# Altium PCB PCB.PcbDoc
Units mm, origin at the board's own origin, x right, y up, seen from the top; angles counter-clockwise.
Board outline 39.05 x 32.07 mm, 2 copper layers (Top Layer, Bottom Layer); 39 components, 35 nets, 167 pads, 103 vias.
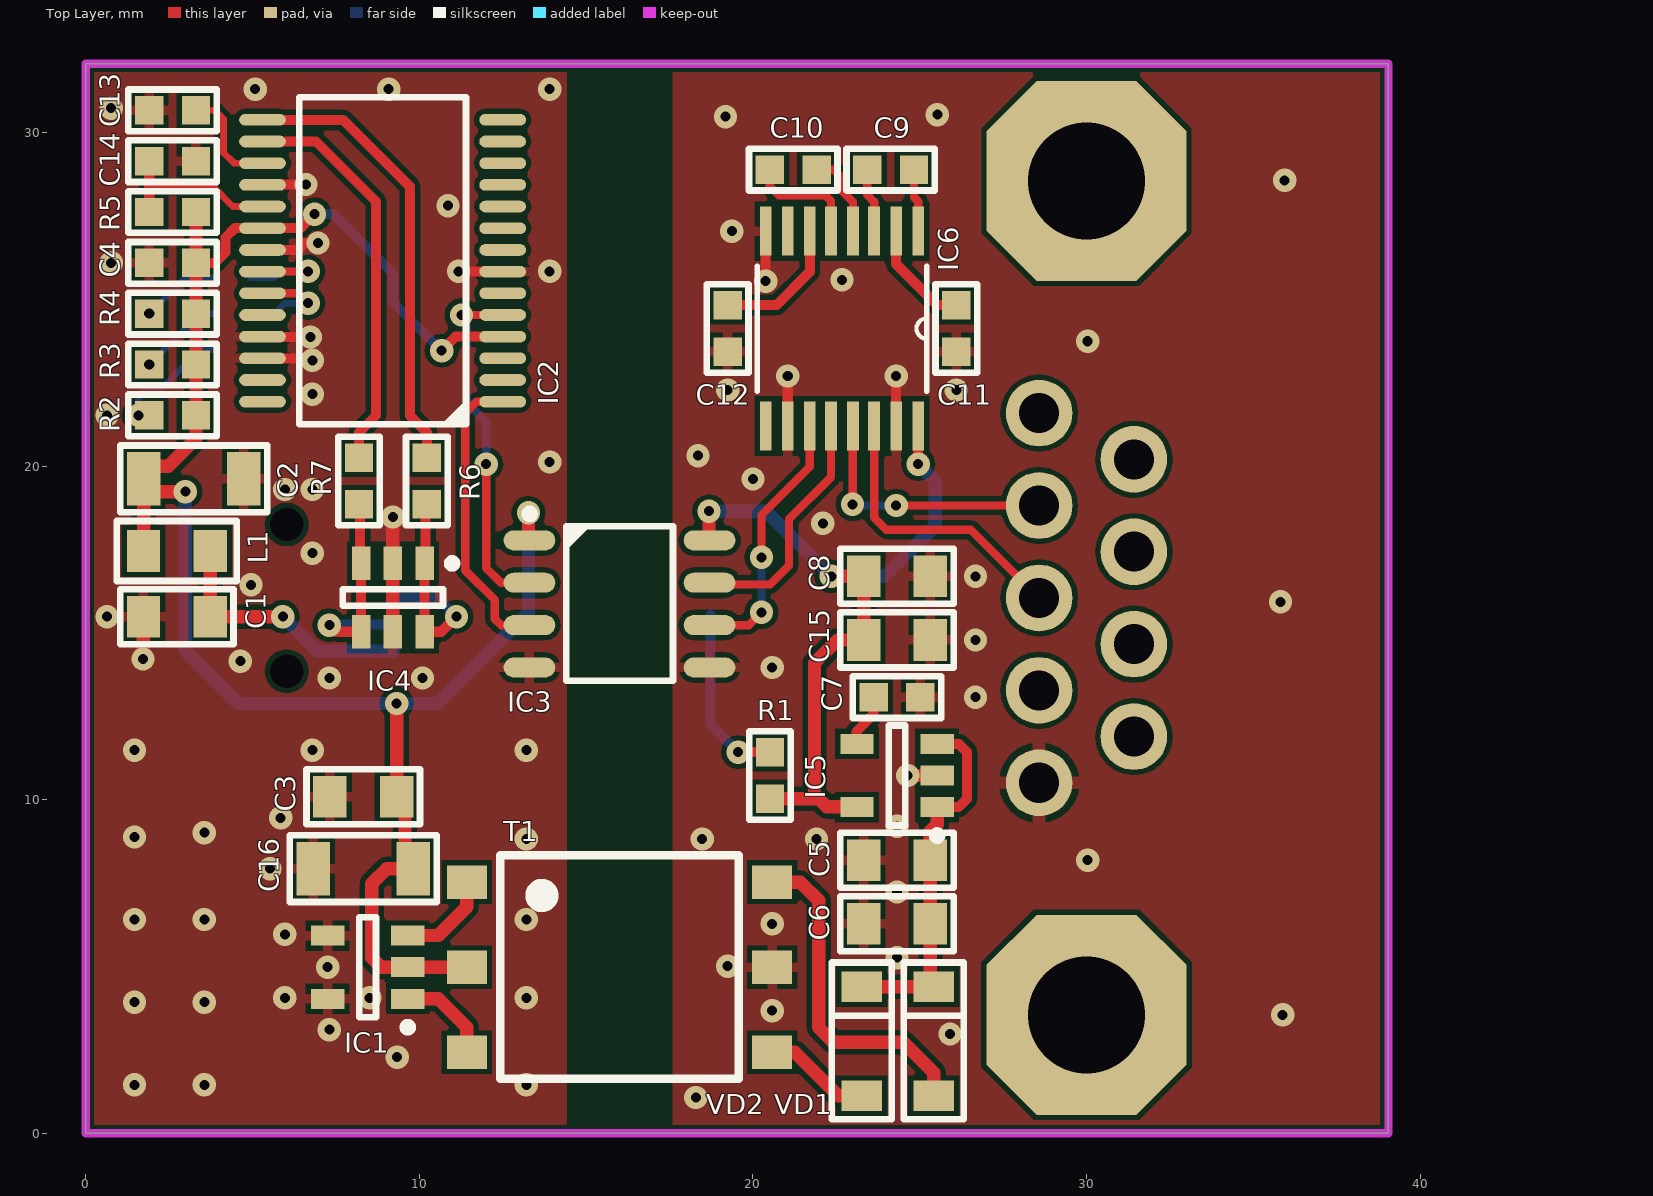
[diagram p0: Top Layer view]
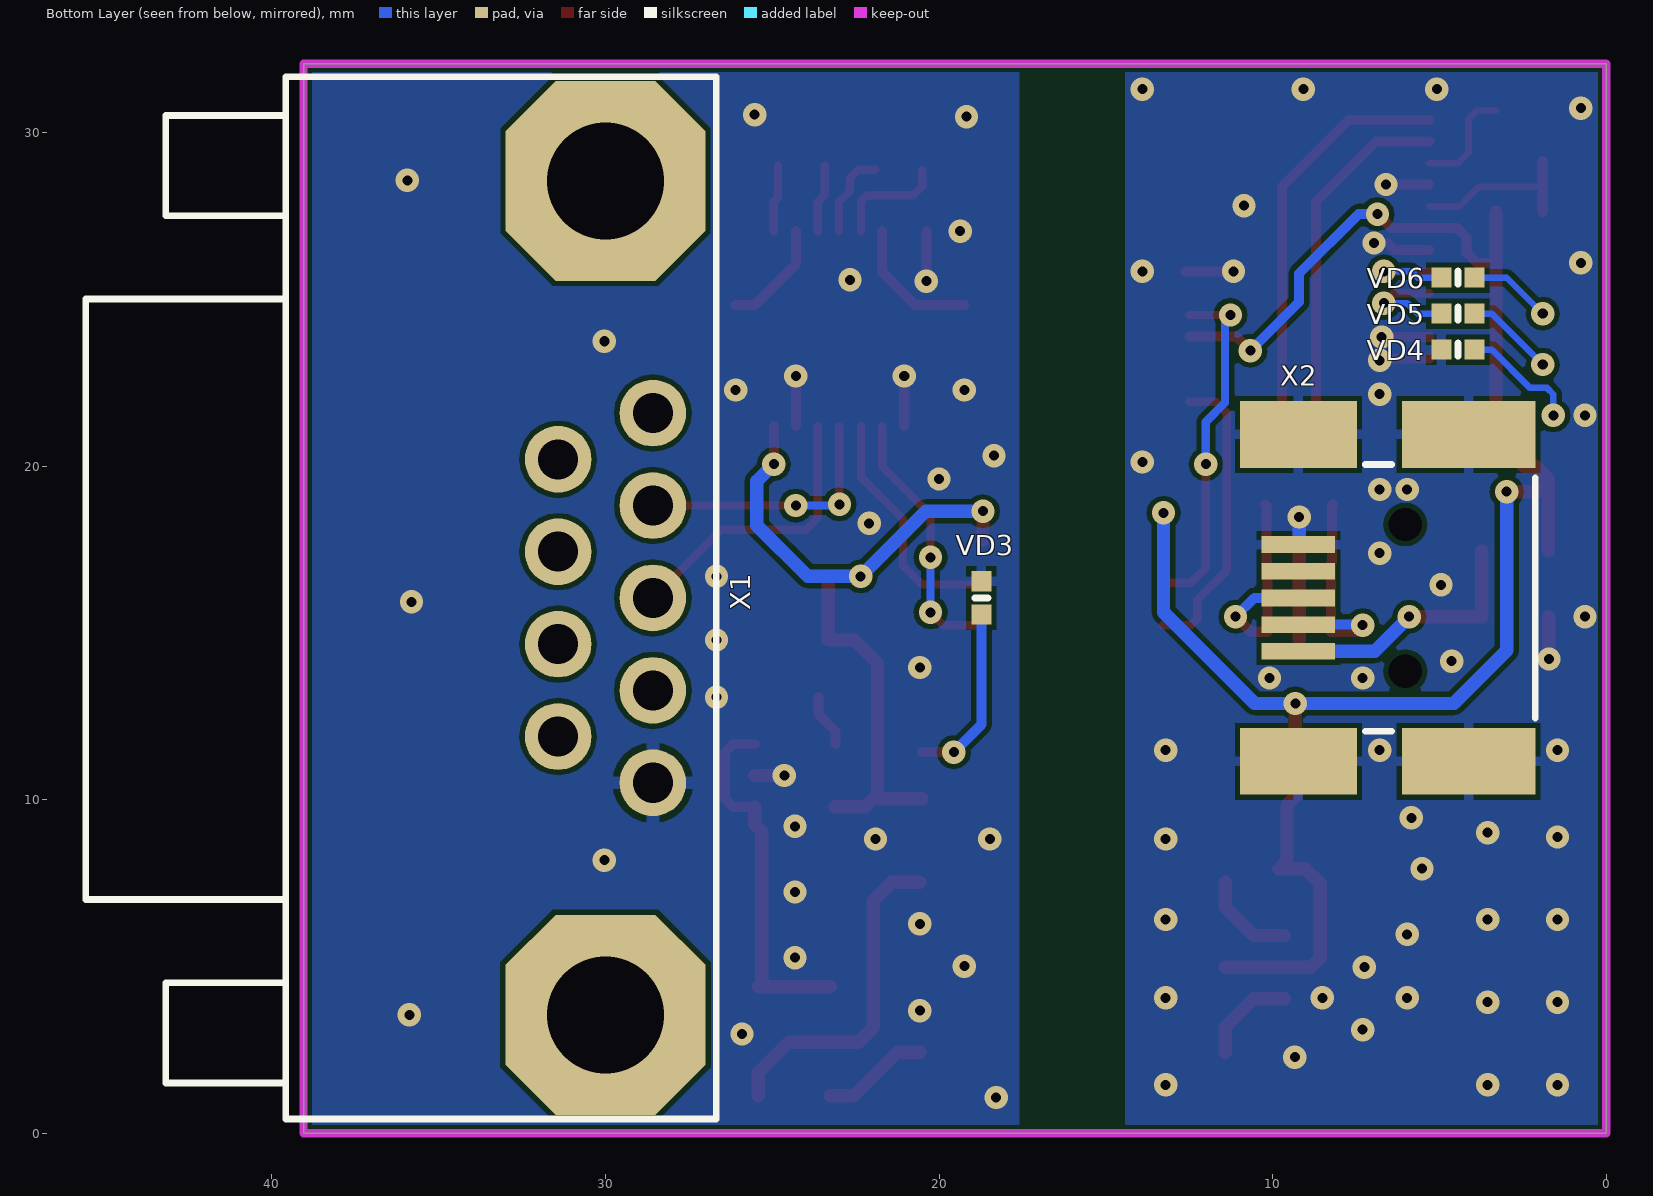
[diagram p1: Bottom Layer view, seen from below]
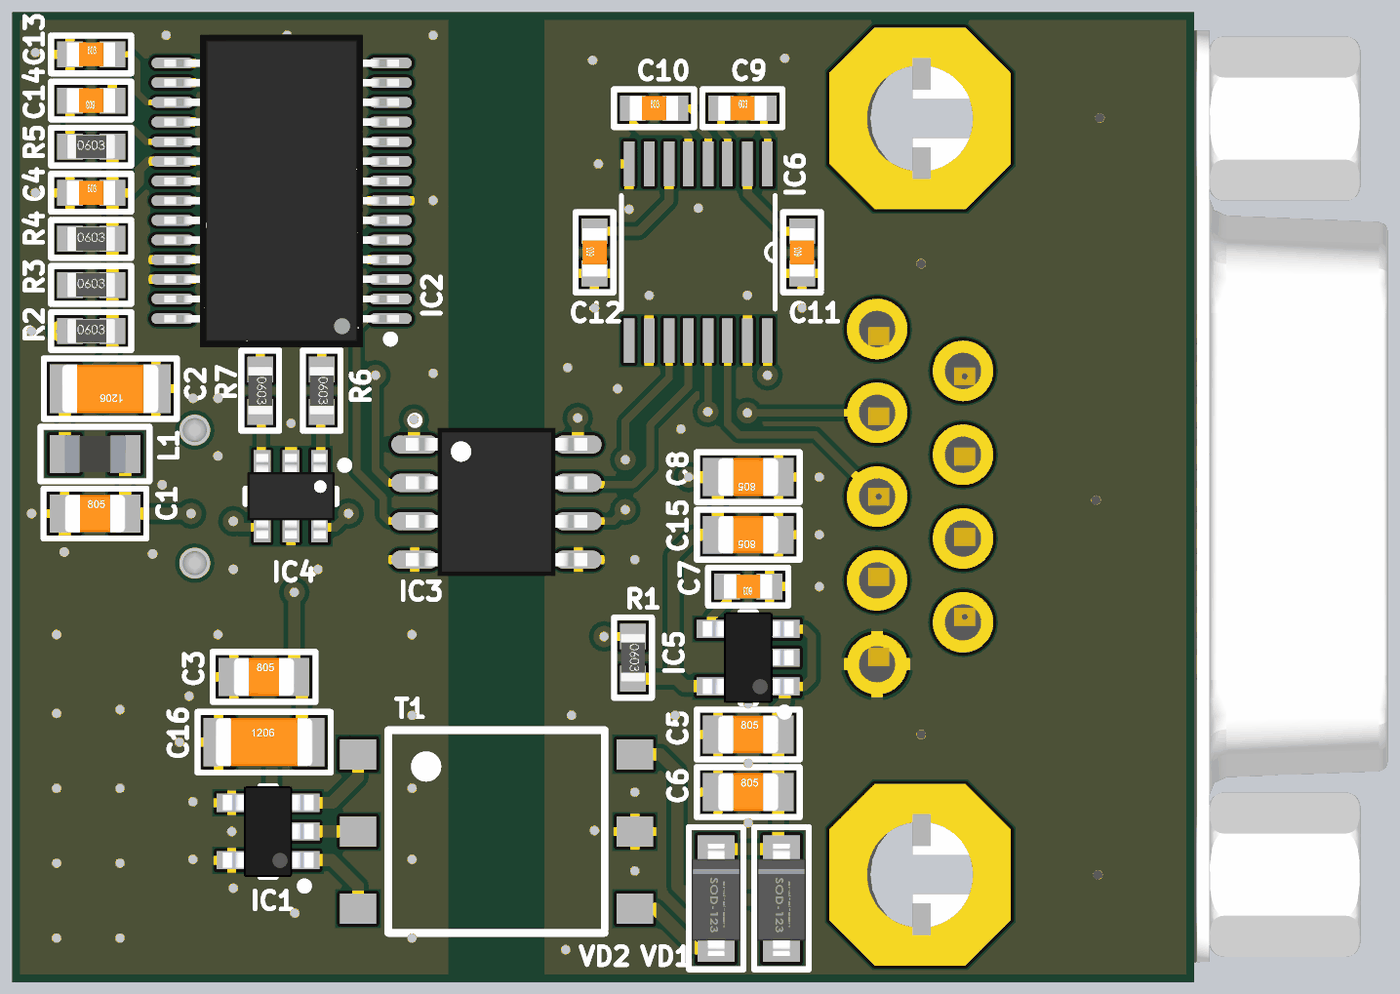
[diagram p2: 3D render of the assembled board from above, using the file's embedded part models]
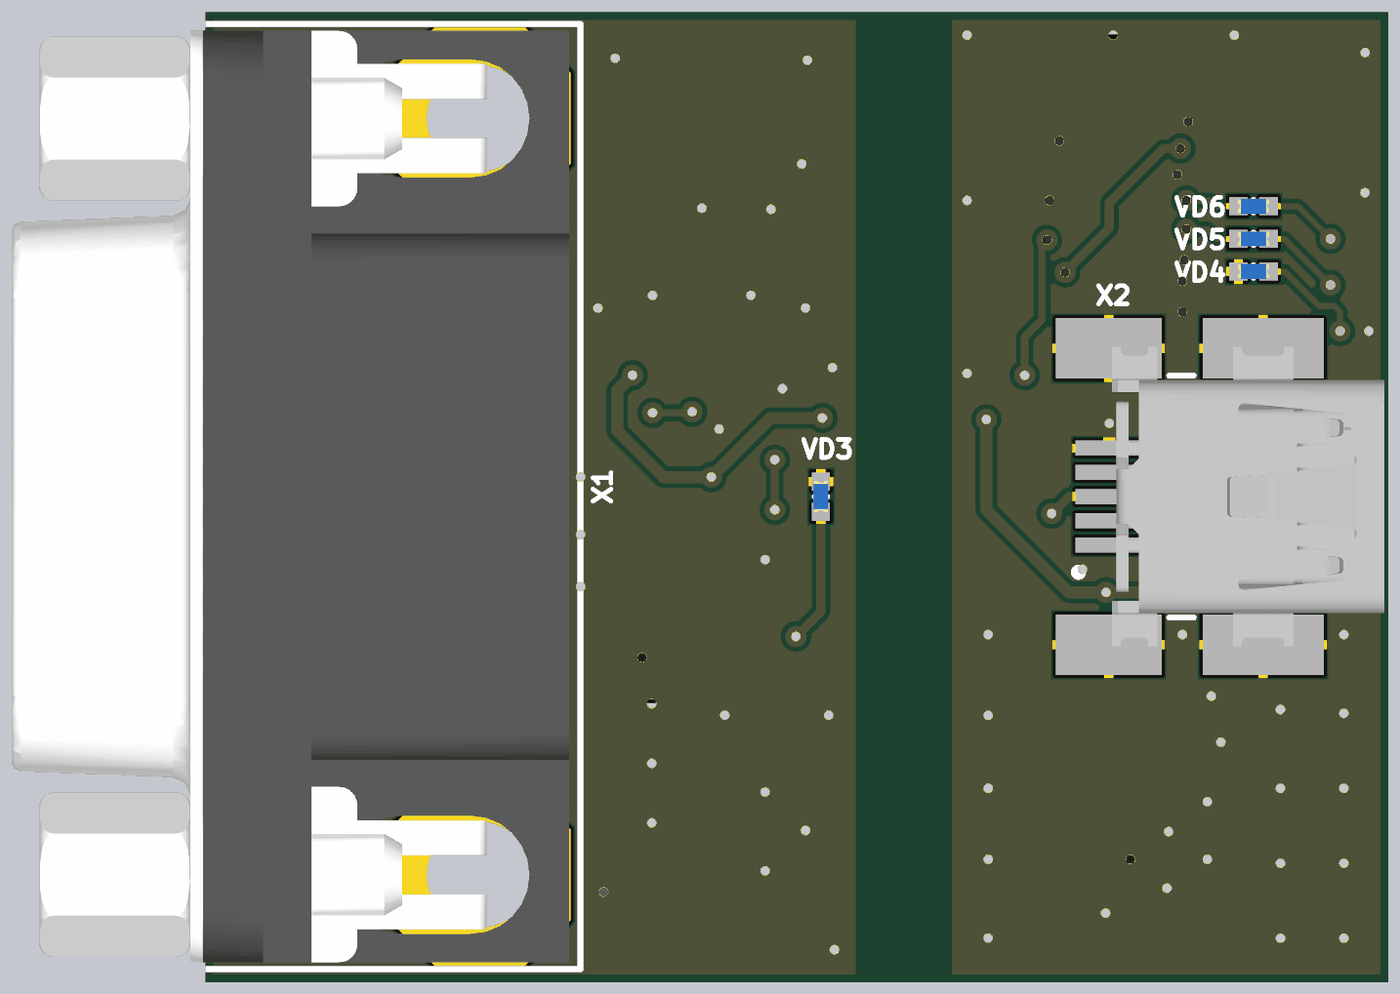
[diagram p3: 3D render of the assembled board from below, using the file's embedded part models]

## Layer stack, top to bottom
Top Solder: solder mask 0.0102, Solder Resist, Dk 3.5
Top Layer: signal copper 0.0356
Dielectric 1: dielectric 0.32, FR-4, Dk 4.8
Bottom Layer: signal copper 0.0356
Bottom Solder: solder mask 0.0102, Solder Resist, Dk 3.5

## Board outline
0,0 39.053,0 39.053,32.068 0,32.068

## Design rules (kind name [scope] priority, off if disabled: settings)
BoardOutlineClearance [All] p1: gap=0.25 ignorepadtopadclearanceinfootprint=FALSE except(0.2: Arc-OutlineEdge Arc-CavityEdge Arc-CutoutEdge Arc-SplitBarrior Arc-SplitContinuation Track-OutlineEdge Track-CavityEdge Track-CutoutEdge Track-SplitBarrior Track-SplitContinuation Region-OutlineEdge Region-CavityEdge Region-CutoutEdge Region-SplitBarrior Region-SplitContinuation Text-OutlineEdge Text-CavityEdge Text-CutoutEdge Text-SplitBarrior Text-SplitContinuation)
Clearance Clearance_1 [InPolygon] p1: gap=0.15 ignorepadtopadclearanceinfootprint=FALSE
Clearance [All] p2: gap=0.15 ignorepadtopadclearanceinfootprint=FALSE
HoleSize [All] p1: absolutevalues=TRUE maxlimit=2.54 minlimit=0.3 maxpercent=80.000 minpercent=20.000
HoleToHoleClearance [All] p1: gap=0.2 allowstackedmicrovias=TRUE
MinimumAnnularRing [All] p1: minimumring=0.2
MinimumSolderMaskSliver [All] p1: minsoldermaskwidth=0.05
PlaneConnect [All] p1: planeconnectstyle=Relief reliefexpansion=0.508 reliefentries=4 reliefconductorwidth=0.4 reliefairgap=0.15
PolygonConnect PolygonConnect_1 [IsVia] p1: connectstyle=Direct reliefconductorwidth=0.254 reliefentries=4 polygonreliefangle="90 Angle" airgapwidth=0.254
PolygonConnect [All] p2: thpad.connectstyle=Relief thpad.reliefconductorwidth=0.4 thpad.reliefentries=4 thpad.polygonreliefangle="90 Angle" thpad.airgapwidth=0.2 smdpad.connectstyle=Relief smdpad.reliefconductorwidth=0.3 smdpad.reliefentries=4 smdpad.polygonreliefangle="90 Angle" smdpad.airgapwidth=0.15 via.connectstyle=Relief via.reliefconductorwidth=0.254 via.reliefentries=4 via.polygonreliefangle="45 Angle" via.airgapwidth=0.254
RoutingVias [All] p1: holewidth=0.3 width=0.7 viastyle="Through Hole" minholewidth=0.3 minwidth=0.7 maxholewidth=0.3 maxwidth=0.7
SilkToSilkClearance [All] p1: silktosilkclearance=0.05
SilkToSolderMaskClearance [IsPad] p1: minsilkscreentomaskgap=0.05 clearancetoexposedcopper=TRUE
SolderMaskExpansion [All] p1: expansion=0.102
UnRoutedNet [All] p1: checkbadconnections=TRUE
UnpouredPolygon [All] p1: allowunpoured=TRUE
Width [All] p1: maxlimit=2 minlimit=0.125 preferedwidth=0.15 minimp=50.000000 maximp=50.000000 favimp=50.000000
22 further rules are at their usual default settings.

## Components (designator, comment, footprint, x,y, rotation, side; value= is the part's Value field where it differs from the comment)
C1 "Ceramic capacitor, 0.1μF, X7R, ±10%, 16V, 0805, -55...+125°C" "CAP: 0805" 2.731,15.494 r0 top value=0.1?F
C2 "Ceramic capacitor, 10.0μF, X7R, ±10%, 50V, 1206, -55...+125°C" "CAP: 1206" 3.239,19.622 r180 top value=10.0?F
C3 "Ceramic capacitor, 0.1μF, X7R, ±10%, 16V, 0805, -55...+125°C" "CAP: 0805" 8.319,10.097 r0 top value=0.1?F
C4 "Ceramic capacitor, 0.1μF, X7R, ±10%, 16V, 0805, -55...+125°C" "CAP: 0603" 2.604,26.099 r0 top value=0.1?F
C5 "Ceramic capacitor, 10.0μF, X7R, ±10%, 16V, 0805, -55...+125°C" "CAP: 0805" 24.321,8.192 r0 top value=10.0?F
C6 "Ceramic capacitor, 0.1μF, X7R, ±10%, 16V, 0805, -55...+125°C" "CAP: 0805" 24.321,6.287 r0 top value=0.1?F
C7 "Ceramic capacitor, 10nF, X7R, ±10%, 16V, 0603, -55...+125°C" "CAP: 0603" 24.321,13.081 r180 top value=10nF
C8 "Ceramic capacitor, 10.0μF, X7R, ±10%, 16V, 0805, -55...+125°C" "CAP: 0805" 24.321,16.701 r180 top value=10.0?F
C9 "Ceramic capacitor, 0.22μF, X7R, ±10%, 16V, 0603, -55...+125°C" "CAP: 0603" 24.13,28.893 r0 top value=0.22?F
C10 "Ceramic capacitor, 1.0μF, X7R, ±10%, 16V, 0603, -55...+125°C" "CAP: 0603" 21.209,28.893 r0 top value=1.0?F
C11 "Ceramic capacitor, 1.0μF, X7R, ±10%, 16V, 0603, -55...+125°C" "CAP: 0603" 26.099,24.13 r90 top value=1.0?F
C12 "Ceramic capacitor, 1.0μF, X7R, ±10%, 16V, 0603, -55...+125°C" "CAP: 0603" 19.241,24.13 r90 top value=1.0?F
C13 "Ceramic capacitor, 0.1μF, X7R, ±10%, 16V, 0603, -55...+125°C" "CAP: 0603" 2.604,30.671 r0 top value=0.1?F
C14 "Ceramic capacitor, 0.1μF, X7R, ±10%, 16V, 0603, -55...+125°C" "CAP: 0603" 2.604,29.147 r180 top value=0.1?F
C15 "Ceramic capacitor, 0.1μF, X7R, ±10%, 16V, 0805, -55...+125°C" "CAP: 0805" 24.321,14.796 r180 top value=0.1?F
C16 "Ceramic capacitor, 10.0μF, X7R, ±10%, 50V, 1206, -55...+125°C" "CAP: 1206" 8.319,7.938 r0 top value=10.0?F
IC1 "SN6501" SOT23-5 8.452,4.984 r180 top
IC2 "FT232RL" 28-SSOP 8.898,26.162 r180 top locked
IC3 "IC digital isolator, 100Mbps, 3000Vrms, 2.25...5.5V, -55...+125°C, 8-SOIC" 8-SOIC 16,15.875 r0 top
IC4 "SN65220DBVR" SOT23-6 9.208,16.066 r270 top locked
IC5 "LP2985IM5-5.0" SOT23-5 24.321,10.732 r180 top locked
IC6 "MAX3232CPW" SOP65P640X120-16N 22.67,24.13 r270 top
L1 "Fixed inductor, 47μH, ±20%, 0805, 100mA, -55...+125°C" "IND: 0805" 2.731,17.463 r0 top value=47?H
R1 "Resistor film, 270R, ±5%, 0603, 0.1W, -55...+125°C" "RES: 0603" 20.511,10.731 r270 top value=270R
R2 "Resistor film, 270R, ±5%, 0603, 0.1W, -55...+125°C" "RES: 0603" 2.604,21.527 r0 top value=270R
R3 "Resistor film, 270R, ±5%, 0603, 0.1W, -55...+125°C" "RES: 0603" 2.604,23.051 r0 top value=270R
R4 "Resistor film, 270R, ±5%, 0603, 0.1W, -55...+125°C" "RES: 0603" 2.604,24.575 r0 top value=270R
R5 "Resistor film, 10K, ±5%, 0603, 0.1W, -55...+125°C" "RES: 0603" 2.604,27.623 r0 top value=10K
R6 "Resistor film, 22R, ±5%, 0603, 0.1W, -55...+125°C" "RES: 0603" 10.223,19.558 r270 top value=22R
R7 "Resistor film, 22R, ±5%, 0603, 0.1W, -55...+125°C" "RES: 0603" 8.191,19.558 r270 top value=22R
T1 "760390014" PCBComponent_1 11.425,4.984 r0 top
VD1 "Schottky diode, 80V, 500mA, 1V, 15pF, SOD-123, -55...+150°C" "DIODE: SOD123" 25.419,1.128 r90 top
VD2 "Schottky diode, 80V, 500mA, 1V, 15pF, SOD-123, -55...+150°C" "DIODE: SOD123" 23.26,1.128 r90 top
VD3 "LED, *, *, *, -55...+150°C" "LED: 0402B" 18.733,16.055 r90 bottom
VD4 "LED, *, *, *, -55...+150°C" "LED: 0402B" 4.445,23.495 r0 bottom
VD5 "LED, *, *, *, -55...+150°C" "LED: 0402B" 4.445,24.575 r0 bottom
VD6 "LED, *, *, *, -55...+150°C" "LED: 0402B" 4.445,25.654 r0 bottom
X1 "Connector, 10pin, 2.54mm, 500VAC, 3A" "CON: DB-9M" 30,16.055 r180 bottom
X2 "USB mini B" "CON: 0675031020" 9.228,16.055 r0 bottom locked

## Footprints (in the part's own frame and the unit in brackets; to place one, negate y for a bottom-side part, rotate by r counter-clockwise, add the part's x,y. Pads: shape width x height; smd on the part's side, far side on the other; paste and mask are expansions set on the pad)
8-SOIC [mm] "pitch 1.27 mm"
  rrect100% 1.55x0.6 smd: 1(-2.7,1.905) 2(-2.7,0.635) 3(-2.7,-0.635) 4(-2.7,-1.905) 5(2.7,-1.905) 6(2.7,-0.635) 7(2.7,0.635) 8(2.7,1.905)
  round 0.7 on Mech1: 28(-2.395,1.8)
  silkscreen extent -2.82,-2.3 1.61,2.82, body extent -3,-2.45 3,2.45, height 1.75
28-SSOP [mm] "pitch 0.65 mm"
  rrect100% 1.4x0.35 smd: 1(-3.6,4.225) 2(-3.6,3.575) 3(-3.6,2.925) 4(-3.6,2.275) 5(-3.6,1.625) 6(-3.6,0.975) 7(-3.6,0.325) 8(-3.6,-0.325) 9(-3.6,-0.975) 10(-3.6,-1.625) 11(-3.6,-2.275) 12(-3.6,-2.925) 13(-3.6,-3.575) 14(-3.6,-4.225) 15(3.6,-4.225) 16(3.6,-3.575) 17(3.6,-2.925) 18(3.6,-2.275) 19(3.6,-1.625) 20(3.6,-0.975) 21(3.6,-0.325) 22(3.6,0.325) 23(3.6,0.975) 24(3.6,1.625) 25(3.6,2.275) 26(3.6,2.925) 27(3.6,3.575) 28(3.6,4.225)
  round 0.5 on Top Overlay: ""(-3.6,4.9)
  round 0.5 on Mech1: ""(-3.4,4.6)
  silkscreen extent -2.5,-4.9 2.5,4.9, body extent -3.88,-5.16 3.88,5.17, height 2.15
"CAP: 0603" [mm]
  rect 0.85x0.85 smd: 1(-0.7,0) 2(0.7,0)
  silkscreen extent -1.33,-0.63 1.33,0.63, body extent -0.8,-0.4 0.8,0.4, height 0.3
"CAP: 0805" [mm]
  rect 1x1.25 smd: 1(-1,0) 2(1,0)
  silkscreen extent -1.7,-0.82 1.7,0.82, body extent -1,-0.62 1,0.63, height 0.78
"CAP: 1206" [mm]
  rect 1x1.6 smd: 1(-1.5,0) 2(1.5,0)
  silkscreen extent -2.2,-1 2.2,1, body extent -1.6,-0.8 1.6,0.8, height 1
"CON: 0675031020" [mm]
  rect 4x2 smd: 0(-5.1,-4.9) 0(-5.1,4.9)
  rect 3.5x2 smd: 0(0,-4.9) 0(0,4.9)
  rect 2.2x0.5 smd: 1(0,1.6) 2(0,0.8) 3(0,0) 4(0,-0.8) 5(0,-1.6)
  round 0 hole 1: ""(-3.2,-2.2) ""(-3.2,2.2)
  round 0.5 on Mech1: ""(-0.6,4.5)
  round 0.5 on Bottom Overlay: ""(1,2.5)
  silkscreen extent -7.1,-4 -2,4, body extent -9.1,-4.95 -0.1,4.95, height 3.95
"CON: DB-9M" [mm]
  round 2 hole 1.2: 1(1.42,5.54) 2(1.42,2.77) 3(1.42,0) 4(1.42,-2.77) 5(1.42,-5.54) 6(-1.42,4.155) 7(-1.42,1.385) 8(-1.42,-1.385) 9(-1.42,-4.155)
  round 0.5 on Mech1: 31(-14.9,14.8)
  oct 6x6 hole 3.5: G1(0,12.5) G2(0,-12.5)
  silkscreen extent -15.58,-15.62 3.32,15.62, body extent -15.45,-15.4 2.95,15.4, height 12.53
"DIODE: SOD123" [mm]
  rect 0.91x1.22 smd: 1(0,0) 2(3.275,0)
  round 0.5 on Mech1: 4(3,0.4)
  silkscreen extent -0.7,-0.9 4,0.9, body extent -0.25,-0.8 3.45,0.8, height 1.25
"IND: 0805" [mm]
  rect 1x1.25 smd: 1(-1,0) 2(1,0)
  silkscreen extent -1.8,-0.9 1.8,0.9, body extent -1,-0.62 1,0.63, height 0.85
"LED: 0402B" [mm]
  rect 0.6x0.6 smd: 1(-0.5,0) 2(0.5,0)
  silkscreen extent 0,-0.2 0,0.2, body extent -0.5,-0.25 0.51,0.25, height 0.45
PCBComponent_1 [mm]
  rect 1.2x1 smd: 1(0,2.55) 2(0,0) 3(0,-2.55) 4(9.15,-2.55) 5(9.15,0) 6(9.15,2.55)
  silkscreen extent 1,-3.35 8.15,3.35
"RES: 0603" [mm]
  rect 0.85x0.85 smd: 1(-0.7,0) 2(0.7,0)
  silkscreen extent -1.33,-0.63 1.33,0.63, body extent -0.8,-0.4 0.8,0.4, height 0.44
SOP65P640X120-16N [mil]
  rect 58x14 smd: 1(-115,90) 2(-115,64) 3(-115,38) 4(-115,13) 5(-115,-13) 6(-115,-38) 7(-115,-64) 8(-115,-90) 9(115,-90) 10(115,-64) 11(115,-38) 12(115,-13) 13(115,13) 14(115,38) 15(115,64) 16(115,90)
  silkscreen extent -74,-100 74,100
SOT23-5 [mm] "pitch 0.95 mm"
  rect 1x0.6 smd: 1(-1.2,0.95) 2(-1.2,0) 3(-1.2,-0.95) 4(1.2,-0.95) 5(1.2,0.95)
  round 0.5 on Mech1: ""(-1.1,1.1)
  silkscreen extent -1.33,-1.5 0.25,1.92, body extent -1.5,-1.5 1.5,1.5, height 1.3
SOT23-6 [mm] "pitch 0.95 mm"
  rect 1x0.55 smd: 1(-1.025,0.95) 2(-1.025,0) 3(-1.025,-0.95) 4(1.025,-0.95) 5(1.025,0) 6(1.025,0.95)
  round 0.5 on Mech1: ""(-0.8,1)
  silkscreen extent -1.15,-1.5 0.25,1.9, body extent -1.4,-1.45 1.4,1.45, height 1.45

## Part data
C1 C3 C4 C6 C15: library part Ceramic_0805, Manufacturer=Yageo, Package=0805, PartNumber=CC0805KRX7R7BB104, Temperature=-55...+125°C, Tolerance=±10%, TypeCapacitor="Ceramic capacitor", TypeDielectric=X7R, ValueManufacturerPartNumber="Ceramic capacitor, 0.1?F, X7R, ±10%, 16V, 0805, -55...+125°C", Voltage=16V, HelpURL=https://www.digikey.com/product-detail/en/yageo/CC0805KRX7R7BB104/311-1142-1-ND/303052
C2 C16: library part Ceramic_1206, Manufacturer=Yageo, Package=1206, PartNumber=CC1206KRX7R9BB104, Temperature=-55...+125°C, Tolerance=±10%, TypeCapacitor="Ceramic capacitor", TypeDielectric=X7R, ValueManufacturerPartNumber="Ceramic capacitor, 10.0?F, X7R, ±10%, 50V, 1206, -55...+125°C", Voltage=50V, HelpURL=https://www.digikey.com/product-detail/en/yageo/CC1206KRX7R9BB104/311-1179-1-ND/303089
C5 C8: library part Ceramic_0805, Manufacturer=Yageo, Package=0805, PartNumber=CC0805KRX7R7BB104, Temperature=-55...+125°C, Tolerance=±10%, TypeCapacitor="Ceramic capacitor", TypeDielectric=X7R, ValueManufacturerPartNumber="Ceramic capacitor, 10.0?F, X7R, ±10%, 16V, 0805, -55...+125°C", Voltage=16V, HelpURL=https://www.digikey.com/product-detail/en/yageo/CC0805KRX7R7BB104/311-1142-1-ND/303052
C7: library part Ceramic_0603, Manufacturer=Yageo, Package=0603, PartNumber=CC0603KRX7R7BB104, Temperature=-55...+125°C, Tolerance=±10%, TypeCapacitor="Ceramic capacitor", TypeDielectric=X7R, Voltage=16V, HelpURL=https://www.digikey.com/product-detail/en/yageo/CC0603KRX7R7BB104/311-1088-1-ND/302998, ValueManufacturerPartNumber="Ceramic capacitor, 10nF, X7R, ±10%, 16V, 0603, -55...+125°C"
C9: library part Ceramic_0603, Manufacturer=Yageo, Package=0603, PartNumber=CC0603KRX7R7BB104, Temperature=-55...+125°C, Tolerance=±10%, TypeCapacitor="Ceramic capacitor", TypeDielectric=X7R, ValueManufacturerPartNumber="Ceramic capacitor, 0.22?F, X7R, ±10%, 16V, 0603, -55...+125°C", Voltage=16V, HelpURL=https://www.digikey.com/product-detail/en/yageo/CC0603KRX7R7BB104/311-1088-1-ND/302998
C10 C11 C12: library part Ceramic_0603, Manufacturer=Yageo, Package=0603, PartNumber=CC0603KRX7R7BB104, Temperature=-55...+125°C, Tolerance=±10%, TypeCapacitor="Ceramic capacitor", TypeDielectric=X7R, ValueManufacturerPartNumber="Ceramic capacitor, 1.0?F, X7R, ±10%, 16V, 0603, -55...+125°C", Voltage=16V, HelpURL=https://www.digikey.com/product-detail/en/yageo/CC0603KRX7R7BB104/311-1088-1-ND/302998
C13 C14: library part Ceramic_0603, Manufacturer=Yageo, Package=0603, PartNumber=CC0603KRX7R7BB104, Temperature=-55...+125°C, Tolerance=±10%, TypeCapacitor="Ceramic capacitor", TypeDielectric=X7R, ValueManufacturerPartNumber="Ceramic capacitor, 0.1?F, X7R, ±10%, 16V, 0603, -55...+125°C", Voltage=16V, HelpURL=https://www.digikey.com/product-detail/en/yageo/CC0603KRX7R7BB104/311-1088-1-ND/302998
IC2: "USB e??e", Package="SSOP-28 FTDI, Future", Availability=Unavailable, MF="FTDI, Future", MP=FT232RL, Price=None, SnapEDA_Link=https://www.snapeda.com/parts/FT232RL/FTDI%2C%20Future%20Technology%20Devices%20International%20Ltd/view-part/1077088/?ref=snap
IC3: library part ISO7721DR, "Digital isolator", Manufacturer="Texas Instruments", Package=8-SOIC, Temperature=-55...+125°C, ComponentType="IC digital isolator", DataRate=100Mbps, HelpURL=https://www.digikey.com/product-detail/en/texas-instruments/ISO7721DR/296-48296-1-ND/8347715, Isolation=3000Vrms, PartNumber=ISO7721DR, Supply=2.25...5.5V, ValueManufacturerPartNumber="IC digital isolator, 100Mbps, 3000Vrms, 2.25...5.5V, -55...+125°C, 8-SOIC"
IC4: "IC SINGLE USB PORT TVS SOT-23-6", Package="SOT-23-6 Texas Instruments", Availability=Unavailable, MF="Texas Instruments", MP=SN65220DBVR, Price=None, SnapEDA_Link=https://www.snapeda.com/parts/SN65220DBVR/Texas%20Instruments/view-part/214591/?ref=snap
IC6: "2/2 Transceiver Full RS232 16-TSSOP", Package="TSSOP-16 Texas Instruments", Availability=Unavailable, MF="Texas Instruments", MP=MAX3232CPW, Price=None, SnapEDA_Link=https://www.snapeda.com/parts/MAX3232CPW/Texas%20Instruments/view-part/396297/?ref=snap
L1: library part Inductor_0805, Manufacturer="Murata Electronics", MaxCurrent=100mA, Package=0805, PartNumber=LQM21FN100M70L, Temperature=-55...+125°C, Tolerance=±20%, TypeInductor="Fixed inductor", ValueManufacturerPartNumber="Fixed inductor, 47?H, ±20%, 0805, 100mA, -55...+125°C", HelpURL=https://www.digikey.com/product-detail/en/murata-electronics-north-america/LQM21FN100M70L/490-4029-1-ND/1016289
R1 R2 R3 R4 R5 R6 R7: library part Resistor_0603, Manufacturer=Yageo, Package=0603, PartNumber=RC0603JR-07100RL, Power=0.1W, Temperature=-55...+125°C, Tolerance=±5%, TypeResistor="Resistor film", HelpURL=https://www.digikey.com/product-detail/en/yageo/RC0603JR-07100RL/311-100GRCT-ND/729644
  R1 R2 R3 R4: ValueManufacturerPartNumber="Resistor film, 270R, ±5%, 0603, 0.1W, -55...+125°C"
  R5: ValueManufacturerPartNumber="Resistor film, 10K, ±5%, 0603, 0.1W, -55...+125°C"
  R6 R7: ValueManufacturerPartNumber="Resistor film, 22R, ±5%, 0603, 0.1W, -55...+125°C"
VD1 VD2: library part Schottky_single, Current=500mA, Manufacturer="Diodes Incorporated", Package=SOD-123, PartNumber=MBR0520L, Temperature=-55...+150°C, Voltage=80V, VoltageDrop=1V, HelpURL=https://www.digikey.com/product-detail/en/diodes-incorporated/MBR0580S1-7/MBR0580S1-7DICT-ND/5080371, RecoveryTime=15pF, TypeDiode="Schottky diode", ValueManufacturerPartNumber="Schottky diode, 80V, 500mA, 1V, 15pF, SOD-123, -55...+150°C"
VD3 VD4: library part LED_single, Color=RED, Temperature=-55...+150°C, TypeDiode=LED, ValueManufacturerPartNumber="LED, *, *, *, -55...+150°C"
VD5: library part LED_single, Color=GREEN, Temperature=-55...+150°C, TypeDiode=LED, ValueManufacturerPartNumber="LED, *, *, *, -55...+150°C"
VD6: library part LED_single, Color=BLUE, Temperature=-55...+150°C, TypeDiode=LED, ValueManufacturerPartNumber="LED, *, *, *, -55...+150°C"
X1: library part Connector_DB9F, CurrentMax=3A, Manufacturer=Connfly, PartNumber=PBD-10, VoltageMax=500VAC, CommentText="\"Ðàçúåì\"", HelpURL=https://www.chipdip.ru/product/pbd-10, Multichannel=10pin, Pitch=2.54mm, TypeConnector=Connector, ValueManufacturerPartNumber="Connector, 10pin, 2.54mm, 500VAC, 3A"
X2: library part Connector_USB_mini_B, Manufacturer=Molex, PartNumber=0675031020, CommentText="\"USB\"", HelpURL=https://www.digikey.com/product-detail/en/molex/0675031020/WM5461CT-ND/1624427, TypeConnector="USB mini B", ValueManufacturerPartNumber="USB mini B"
IC5: SnapEDA_Link=https://www.snapeda.com/parts/LP2985IM550/Texas%20Instruments/view-part/29473/?ref=snap

## Via types
v1: diameter 0.7, hole 0.3, Top Layer to Bottom Layer, tented both sides, 103 vias

## Nets (pads, with @x,y where several pads share a name; then routed paths per layer and width w, separated by ;. In a path a pad name is that pad's centre, name@x,y a point inside that pad or via, vN(x,y) a via of type N, cw(c..) or ccw(c..) an arc to the next point about the centre after c; other vN are vias at no path point)
3V3: C13.2 IC2.17 | length 3.2
  Top Layer w0.2: C13.2 3.873,30.671 4.127,30.416 4.127,29.4 4.441,29.087 IC2.17
+5_ISO: C8.2 C15.2 IC3.8 IC5.5 IC6.16 R1.2 | length 23.8
  Top Layer w0.3: v1(24.956,20.066) IC6.16
  Top Layer w0.4: v1(18.685,18.654) 18.685,17.796 IC3.8 ; R1.2 21.973,10.031 ; v1(22.352,16.701) C8.2 C15.2 22.543,14.796 21.844,14.097 21.844,10.16 21.973,10.031 ; IC5.5@23.121,9.792 22.212,9.792 21.973,10.031
  Bottom Layer w0.4: v1(18.685,18.654) 20.399,18.654 v1(22.352,16.701) 23.94,16.701 25.464,18.225 25.464,19.558 v1(24.956,20.066)
+5_USB: C2.2 C3.2 C4.2 C16.2 IC1.2 IC2.4 IC2.20 IC3.1 L1.1 R2.2 R3.2 R4.2 R5.2 T1.2 | length 57.3
  Top Layer w0.2: IC3.1@13.272,17.809 IC3.1
  Top Layer w0.3: C4.2 3.874,26.099 4.191,26.416 4.191,26.86 4.468,27.137 6.371,27.137 6.378,27.145 6.444,27.145 v1(6.858,27.559) ; v1(10.668,23.469) 11.086,23.887 IC2.4
  Top Layer w0.4: L1.1 1.731,17.526 1.735,17.53 1.735,19.618 C2.2 ; v1(2.985,19.241) 2.039,19.241 1.739,19.541 C2.2 ; R5.2 C4.2 R4.2 R3.2 R2.2 3.304,20.83 2.477,20.003 2.12,20.003 C2.2 ; v1(9.319,12.891) C3.2 9.569,9.847 9.569,8.188 C16.2 9.017,7.938 8.573,7.493 8.573,5.271 8.859,4.984 IC1.2 T1.2 ; IC3.1@13.272,17.809 v1(13.272,18.606)
  Bottom Layer w0.3: v1(6.858,27.559) 7.429,27.559 9.207,25.781 9.207,24.929 v1(10.668,23.469)
  Bottom Layer w0.4: v1(2.985,19.241) 2.985,14.478 4.572,12.891 v1(9.319,12.891) 10.541,12.891 13.272,15.621 v1(13.272,18.606)
C1_m: C9.1 IC6.3 | length 2.1
  Top Layer w0.25: C9.1@23.43,29.02 23.43,28.132 23.635,27.927 IC6.3
C1_p: C9.2 IC6.1 | length 2
  Top Layer w0.25: C9.2@24.83,29.02 24.83,28.066 24.956,27.94 IC6.1
C2_m: C10.1 IC6.5 | length 3.4
  Top Layer w0.25: C10.1 20.509,28.386 20.764,28.131 22.162,28.131 22.339,27.953 IC6.5
C2_p: C10.2 IC6.4 | length 2.6
  Top Layer w0.25: C10.2 22.416,28.893 22.67,28.639 22.67,28.258 23,27.927 IC6.4
D+: IC4.1 IC4.6 R6.2 X2.3 | length 7.1
  Top Layer w0.3: R6.2 10.191,18.825 10.191,17.124 IC4.1 IC4.6 10.659,15.041 v1(11.113,15.494)
  Bottom Layer w0.3: X2.3 10.552,16.055 v1(11.113,15.494)
D-: IC4.3 IC4.4 R7.2 X2.2 | length 6.8
  Top Layer w0.3: v1(7.303,15.24) 7.502,15.041 IC4.4 IC4.3 8.225,17.124 8.225,18.825 R7.2
  Bottom Layer w0.3: v1(7.303,15.24) 7.318,15.255 X2.2
GND: C5.1 C6.1 C7.1 C8.1 C11.1 C12.1 C15.1 IC3.5 IC5.2 IC6.8 IC6.10 IC6.15 T1.5 VD3.2 X1.5 | length 5.4
  Top Layer w0.3: v1(20.384,25.552) IC6.8 ; IC6.10 v1(21.044,22.708) ; IC6.15 v1(24.295,22.708)
  Top Layer w0.4: v1(24.638,10.731) IC5.2
  other v1: 18.288,1.08 25.908,2.985 35.878,3.556 20.574,3.683 19.241,5.017 24.321,5.271 20.574,6.287 24.321,7.239 30.036,8.192 18.479,8.827 21.907,8.826 24.321,9.208 26.67,13.081 20.574,13.97 26.67,14.795 35.814,15.939 26.67,16.7 22.098,18.288 20.002,19.621 18.351,20.32 19.241,22.289 26.098,22.288 30.036,23.749 22.669,25.59 19.368,27.051 35.941,28.575 19.177,30.48 25.527,30.544
GND_USB: C1.1 C2.1 C3.1 C4.1 C13.1 C14.1 C16.1 IC1.4 IC1.5 IC2.7 IC2.18 IC2.21 IC2.25 IC2.26 IC3.4 IC4.2 IC4.5 VD4.2 X2.0 X2.5 | length 13.2
  Top Layer w0.2: IC2.18 IC2.18@5.309,28.448
  Top Layer w0.3: IC2.26 6.735,23.237 v1(6.794,23.177) ; IC2.25 5.309,23.876 v1(6.731,23.876) ; IC2.21 6.357,26.487 6.565,26.695 v1(6.961,26.695) ; IC2.18@5.309,28.448 v1(6.604,28.448) ; v1(11.176,25.845) 11.18,25.841 12.494,25.841 IC2.7 IC2.7@12.61,25.837
  Top Layer w0.4: v1(1.715,14.224) 1.723,14.232 1.723,15.486 C1.1 ; IC4.5@9.208,14.811 IC4.2 v1(9.208,18.479)
  Bottom Layer w0.3: X2.5@9.208,17.675 X2.5
  Bottom Layer w0.4: X2.5@9.208,17.675 v1(9.208,18.479)
  other v1: 1.46,1.46 3.556,1.46 13.208,1.46 9.335,2.286 7.303,3.112 1.46,3.937 3.556,3.937 5.969,4.064 8.509,4.064 13.208,4.064 7.252,4.984 5.969,5.969 1.46,6.413 3.556,6.413 13.208,6.413 5.525,7.938 13.208,8.826 1.46,8.89 3.556,9.017 5.842,9.462 1.46,11.493 6.794,11.493 13.208,11.493 7.303,13.653 10.097,13.653 4.636,14.161 0.635,15.494 4.953,16.447 6.795,17.399 5.969,19.304 6.795,19.304 13.906,20.13 0.635,21.527 6.795,22.162 13.906,25.845 0.762,26.098 10.858,27.813 0.762,30.734 5.08,31.305 9.08,31.305 13.906,31.305
NetC1_2: C1.2 L1.2 X2.1 | length 7.9
  Top Layer w0.4: L1.2 C1.2 5.842,15.494 v1@5.906,15.431
  Bottom Layer w0.4: v1(5.906,15.494) 6.945,14.455 X2.1
NetC5_2: C5.2 C6.2 IC5.1 IC5.3 VD1.2 VD2.2 | length 11.1
  Top Layer w0.3: IC5.1 26.165,9.782 26.416,10.033 26.416,11.43 26.175,11.671 IC5.3@25.521,11.671
  Top Layer w0.4: VD2.2 VD1.2 25.321,4.501 C6.2 C5.2 25.321,9.065 25.521,9.265 IC5.1
NetC7_2: C7.2 IC5.4 | length 1.6
  Top Layer w0.3: IC5.4@23.101,11.682 23.101,12.052 23.621,12.572 C7.2
NetIC1_1: IC1.1 T1.3 | length 2.9
  Top Layer w0.4: IC1.1 10.571,4.034 11.425,3.18 T1.3
NetIC1_3: IC1.3 T1.1 | length 2.9
  Top Layer w0.4: IC1.3 10.57,5.934 11.425,6.79 T1.1
NetIC2_15: IC2.15 R6.1 | length 13.6
  Top Layer w0.3: IC2.15 7.713,30.387 9.716,28.385 9.716,21.526 10.223,21.018 R6.1
NetIC2_16: IC2.16 R7.1 | length 12
  Top Layer w0.3: IC2.16 6.903,29.737 8.7,27.94 8.7,21.526 8.191,21.018 R7.1
NetR1_1: R1.1 VD3.1 | length 5.4
  Top Layer w0.3: v1(19.558,11.43) R1.1
  Bottom Layer w0.3: VD3.1 18.733,12.255 v1(19.558,11.43)
NetR2_1: R2.1 VD4.1 | length 3.5
  Bottom Layer w0.2: v1(1.587,21.526) 1.587,22.162 1.778,22.352 2.286,22.352 3.429,23.495 VD4.1
NetR3_1: R3.1 VD5.1 | length 2.7
  Bottom Layer w0.2: v1(1.904,23.051) 3.428,24.575 VD5.1
NetR4_1: R4.1 VD6.1 | length 2.5
  Bottom Layer w0.2: v1(1.904,24.575) 2.983,25.654 VD6.1
NetT1_4: T1.4 VD2.1 | length 3.2
  Top Layer w0.4: T1.4 21.252,2.434 22.558,1.128 VD2.1
NetT1_6: T1.6 VD1.1 | length 10.1
  Top Layer w0.4: T1.6 21.422,7.534 21.971,6.985 21.971,3.175 22.416,2.731 24.511,2.731 25.419,1.823 VD1.1
RST: C14.2 IC2.19 R5.1 | length 5.2
  Top Layer w0.2: 1.904,28.385 3.81,28.385 4.407,27.787 IC2.19
  Top Layer w0.3: R5.1 1.904,28.385 C14.2
RX: IC3.7 IC6.12 | length 7.3
  Top Layer w0.25: IC3.7 18.754,16.456 20.515,16.456 21.082,17.023 21.082,18.415 22.339,19.672 IC6.12
RxD: IC2.5 IC3.2 | length 10.6
  Top Layer w0.25: v1(11.266,24.537) IC2.5 ; v1(12.002,20.066) 12.002,16.955 12.446,16.51 IC3.2
  Bottom Layer w0.25: v1(11.266,24.537) 11.43,24.373 11.43,21.907 12.002,21.336 v1(12.002,20.066)
RxD_C: IC6.13 X1.2 | length 8
  Top Layer w0.25: v1(22.987,18.86) 22.993,18.866 22.993,21.203 IC6.13 ; v1(24.292,18.825) X1.2
  Bottom Layer w0.25: v1(22.987,18.86) 23.022,18.825 v1(24.292,18.825)
RXLED: IC2.22 VD6.2 | length 3.2
  Top Layer w0.25: IC2.22 5.301,25.841 6.664,25.841 v1(6.668,25.845)
  Bottom Layer w0.2: VD6.2 5.652,25.654 5.842,25.845 v1(6.668,25.845)
TX: IC3.6 IC6.11 | length 7.9
  Top Layer w0.25: IC3.6 19.876,15.24 v1(20.256,15.621) ; v1(20.256,17.272) 20.256,18.542 21.704,19.99 IC6.11
  Bottom Layer w0.25: v1(20.256,15.621) v1(20.256,17.272)
TxD: IC2.1 IC3.3 | length 8.9
  Top Layer w0.25: IC2.1 11.714,21.937 11.376,21.6 11.376,16.881 12.256,16.002 12.256,15.431 12.446,15.24 IC3.3
TxD_C: IC6.14 X1.3 | length 8.7
  Top Layer w0.25: IC6.14 23.635,18.466 24.003,18.098 26.537,18.098 X1.3
TXLED: IC2.23 VD5.2 | length 3.3
  Top Layer w0.25: IC2.23 6.373,25.187 v1(6.668,24.892)
  Bottom Layer w0.2: VD5.2 5.652,24.575 5.969,24.892 v1(6.668,24.892)
V_m: C12.2 IC6.6 | length 4.1
  Top Layer w0.3: C12.2 20.703,24.83 21.704,25.832 IC6.6
V_p: C11.2 IC6.2 | length 3.3
  Top Layer w0.3: IC6.2 24.295,26.06 25.526,24.83 C11.2
pads on no net: IC1. IC2. IC2.2 IC2.3 IC2.6 IC2.8 IC2.9 IC2.10 IC2.11 IC2.12 IC2.13 IC2.14 IC2.24 IC2.27 IC2.28 IC3.28 IC4. IC5. IC6.7 IC6.9 VD1.4 VD2.4 X1.1 X1.4 X1.6 X1.7 X1.8 X1.9 X1.31 X1.G1 X1.G2 X2. X2.4

## Polygon pours and split planes (outlines as drawn)
GND on Top Layer "Top Layer-No Net" (solid, remove dead copper, pour order 4): 17.589,32.068 39.053,32.068 39.053,0 17.589,0
GND_USB on Top Layer "Top Layer-No Net 1" (solid, remove dead copper, pour order 2): 0,32.067 14.414,32.067 14.414,0 0,0
GND on Bottom Layer "Bottom Layer-No Net" (solid, remove dead copper, pour order 6): 17.59,32.068 39.053,32.068 39.053,0 17.59,0
GND_USB on Bottom Layer "Bottom Layer-No Net 1" (solid, remove dead copper, pour order 0): 0,32.067 14.414,32.067 14.414,0 0,0

## Keep-outs
Keep-Out Layer:
  the board outline again, w0.254

## Silkscreen, mask and mechanical layers (free items; w line width, h text height)
Top Overlay:
  lines w0.127: 25.21,23.825 cw(c25.21,24.13) 25.21,24.435